# EAGLE board CORS_Time_Reference-Panel (EAGLE 9.6.2), part 1 of 2
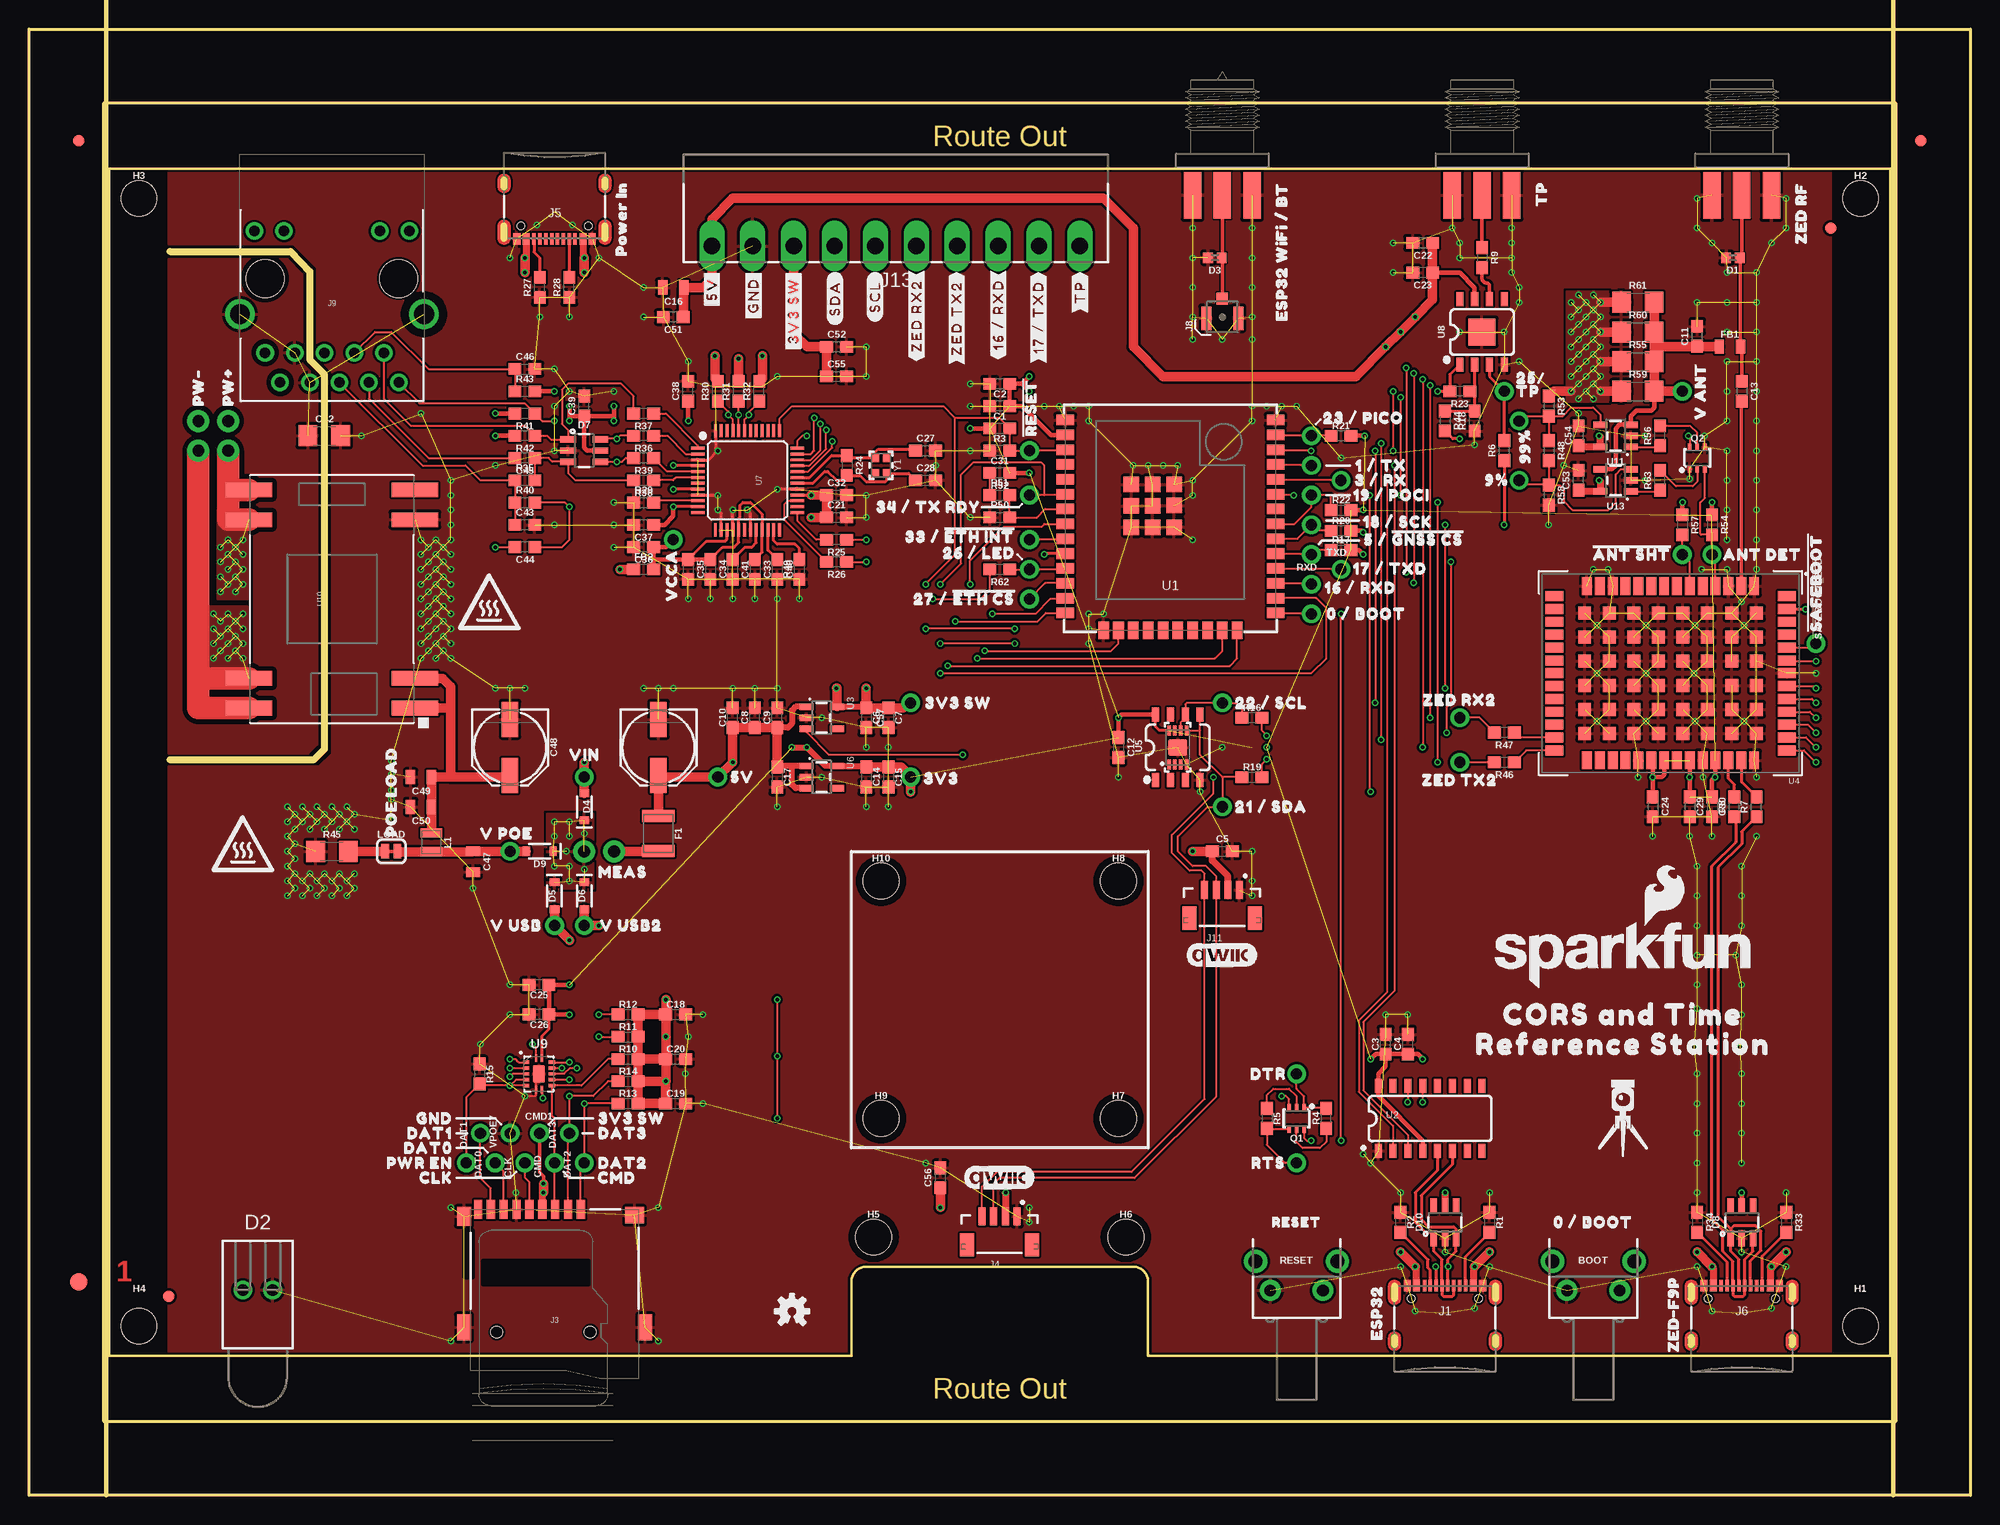
[diagram p0: board, top side]
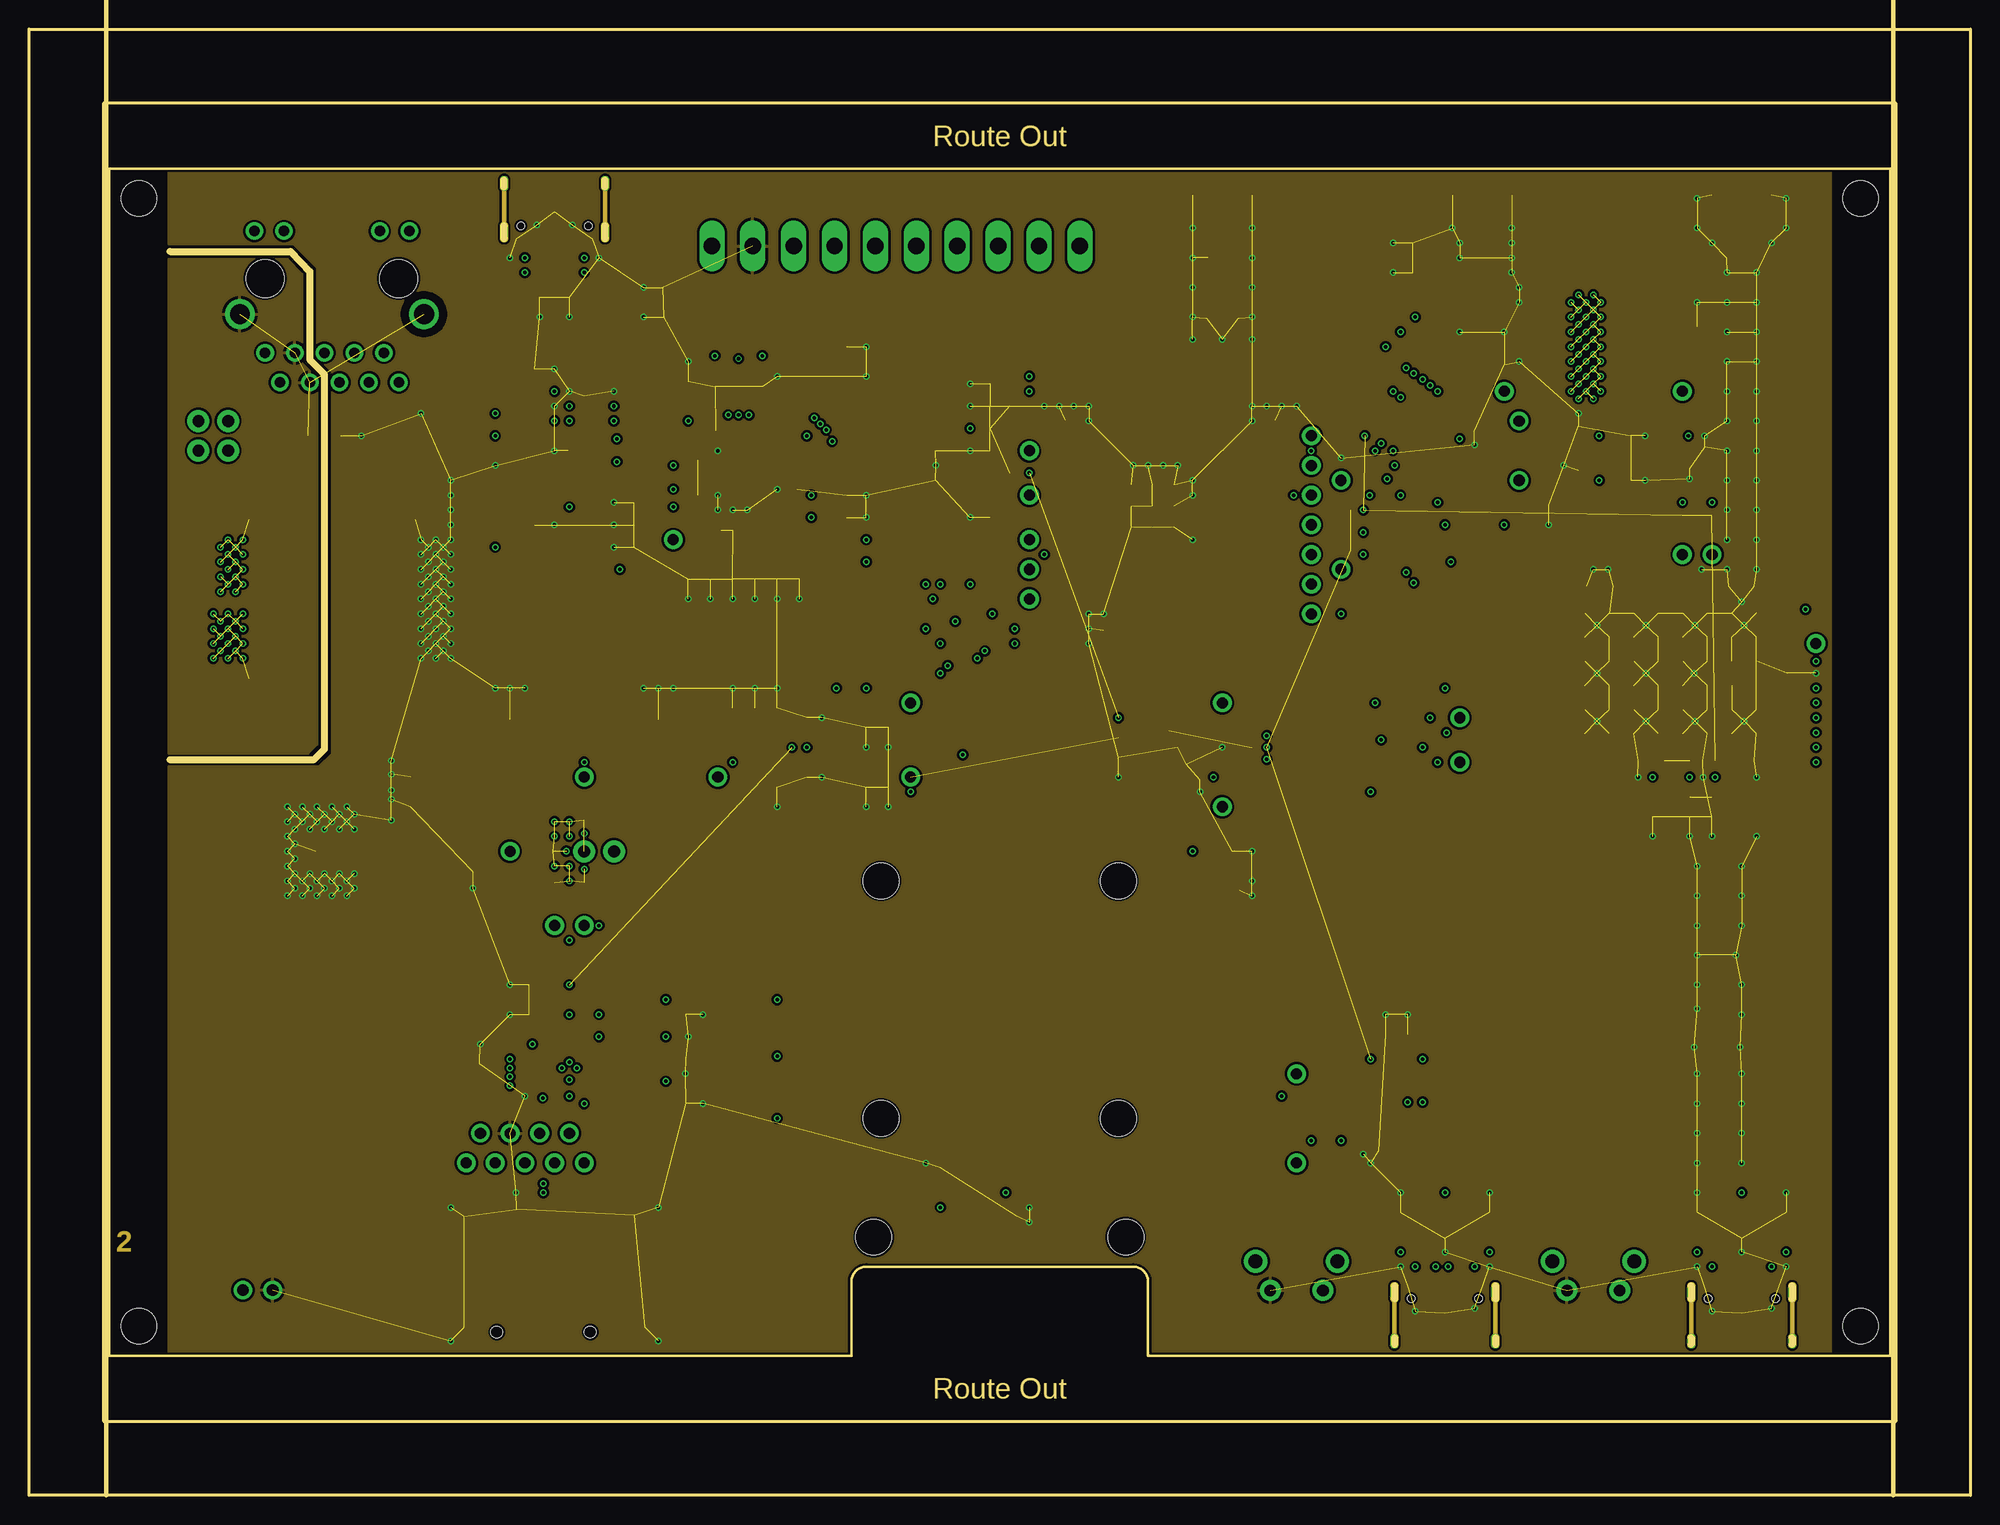
[diagram p1: board, inner layer Route2]
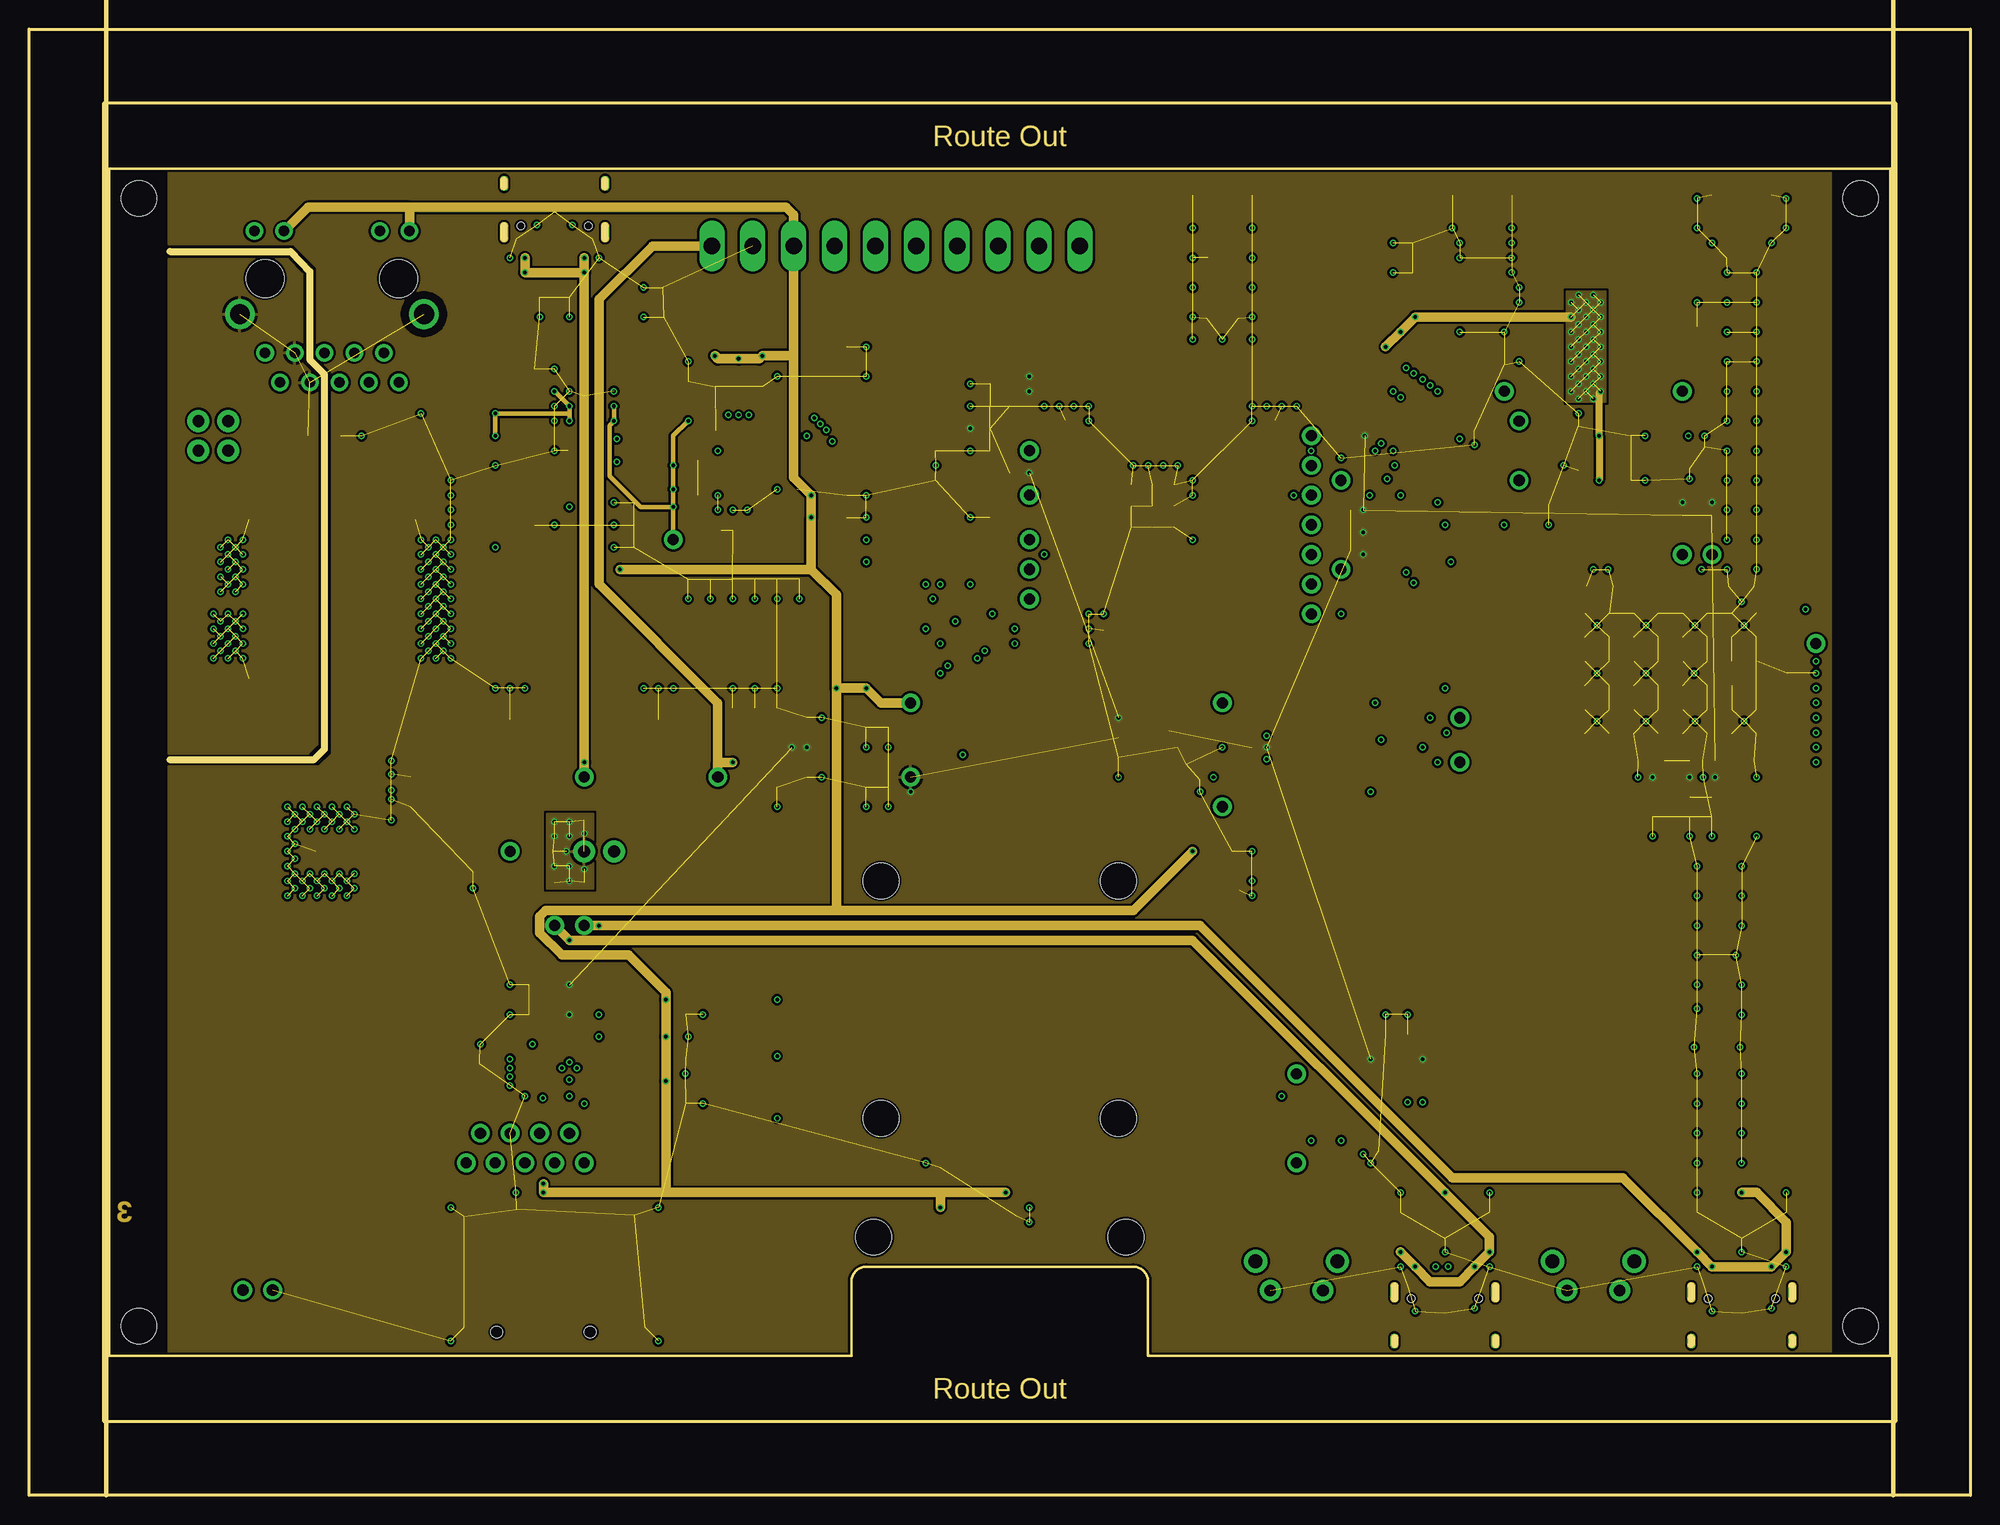
[diagram p2: board, inner layer Route15]
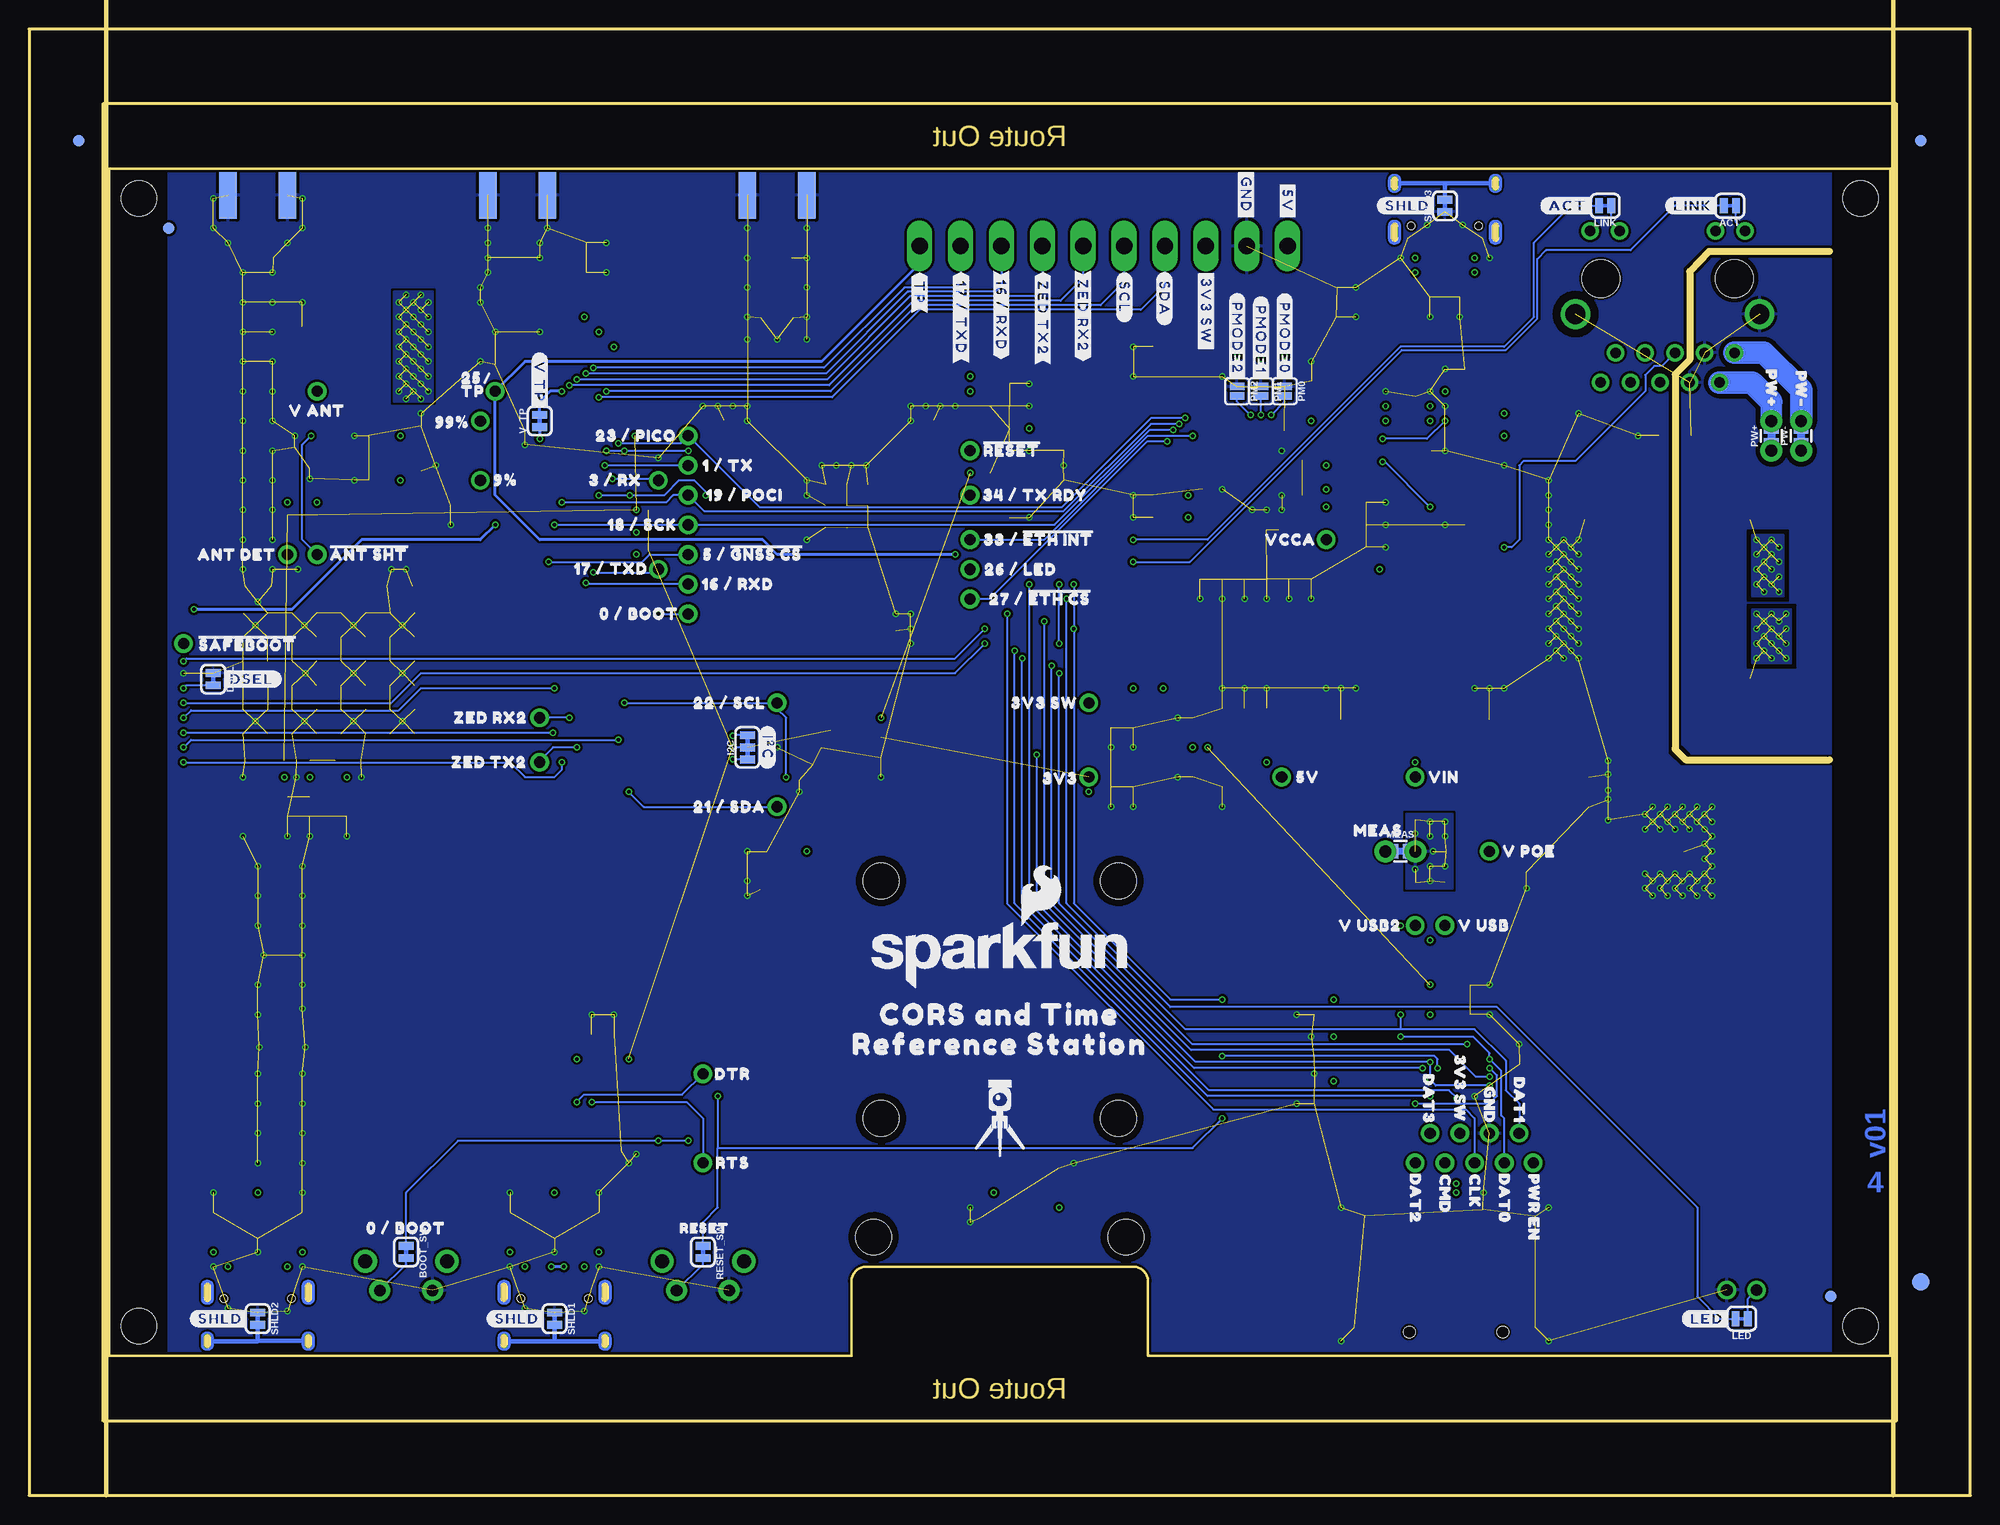
[diagram p3: board, bottom side, seen from below]

Size 166.12 x 125.48 mm. Coordinates in mm from the lower left corner, seen from the top.
Outline: 6.86,11.94 70.36,11.94 70.36,18.29 arc-90 71.63,19.56 94.49,19.56 arc-90 95.76,18.29 95.76,11.94 159.26,11.94 159.26,113.54 6.86,113.54 6.86,11.94
Outline: 6.35,6.35 159.77,6.35 159.77,119.13 6.35,119.13 6.35,6.35
Outline: 166.12,0 0,0 0,125.48 166.12,125.48 166.12,0
Copper layers (1*2*15*16): Top 0.035559375mm / dielectric 0.47751875mm / Route2 0.035559375mm / dielectric 0.47751875mm / Route15 0.035559375mm / dielectric 0.47751875mm / Bottom 0.035559375mm
Design rules "CORS_Time_Reference": minimum track width 5mil, minimum drill 0.2mm, track to track 5mil, track to pad 5mil, pad to pad 5mil, via to via 5mil, smd to smd 5mil, copper to edge 7mil, drill to drill 7mil, minimum pad ring 5mil, minimum via ring 5mil, stop-mask expansion 2.5mil, vias tented up to drill 25mil, thermal gap 10mil
tKeepout: area 6.9,18.3 to 11.9,107.2; area 154.2,18.3 to 159.3,107.2
Milling: 9 lines

## Footprints (pad centres in the part's own frame; a part is rotated, then mirrored left to right if it is on the bottom)
1X01_NO_SILK = drill 0.95 pad 1.6: 1 0,0
SMT-JUMPER_2_NC_TRACE_SILK = smd 0.66 x 1.27: 1 -0.521,0; 2 0.521,0
TACTILE_SWITCH_PTH_RA_8-020 = drill 1 pad 1.8: 1 -2.25,0; 2 2.25,0 | drill 1.2 pad 2: M1 -3.5,2.5; M2 3.5,2.5
0603 = smd 1.1 x 1: 1 -0.85,0; 2 0.85,0
0805 = smd 0.8 x 1.2: 1 -0.9,0; 2 0.9,0
0603_NO_CREAM = smd 1.1 x 1: 1 -0.85,0; 2 0.85,0
1206 = smd 1.6 x 1.8: 1 -1.4,0; 2 1.4,0
PANASONIC_D = smd 3 x 1.4: + 2.4,0; - -2.4,0
0402 = smd 0.85 x 0.9: 1 -0.58,0; 2 0.58,0
CBI-RIGHT-ANGLE-PTH = drill 1 pad 1.6: A -1.27,5; C 1.27,5
SOD-323 = smd 0.63 x 0.83: A 1.15,0; C -1.15,0
SOT-23-6 = smd 0.55 x 1.35: 1 -0.95,-1.375; 2 0,-1.375; 3 0.95,-1.375; 4 0.95,1.375; 5 0,1.375; 6 -0.95,1.375
FIDUCIAL-1X2 = smd 1 x 1: 1 0,0
FIDUCIAL-1.5X3 = smd 1.5 x 1.5: 1 0,0
1210 = smd 1 x 2.8: 1 -1.5,0; 2 1.5,0
STAND-OFF-TIGHT = hole 3.048: 0,0
SMT-JUMPER_3_2-NC_TRACE_SILK = smd 0.66 x 1.27: 1 -1.041,0; 2 0,0; 3 1.041,0
USB-C-16P_4LAYER-PADS = smd 0.3 x 1: A5 -1.25,-0.34; A6 -0.25,-0.34; A7 0.25,-0.34; A8 1.25,-0.34; B5 1.75,-0.34; B6 0.75,-0.34; B7 -0.75,-0.34; B8 -1.75,-0.34 | smd 0.6 x 1: GND -3.225,-0.34; GND2 3.225,-0.34; VBUS1 -2.45,-0.34; VBUS2 2.45,-0.34 | drill 0.4 pad 0.6 long: SHLD1 -4.318,-0.915; SHLD2 4.318,-0.915; SHLD3 -4.318,-5.095; SHLD4 4.318,-5.095 | hole 0.65: -2.89,-1.445; 2.89,-1.445
SMA-EDGE = smd 1.5 x 4: GND@0 -2.54,0; GND@1 2.54,0; SIG 0,0 | smd 1.5 x 4 bottom: GND@2 -2.54,0; GND@3 2.54,0
MICROSD-EXTERNALPIN = smd 0.7 x 1.6: 1 2.25,10.5; 2 1.15,10.5; 3 0.05,10.5; 4 -1.05,10.5; 5 -2.15,10.5; 6 -3.25,10.5; 7 -4.35,10.5; 8 -5.45,10.5; 9 -6.55,10.5 | smd 1.2 x 1.6: 10 -7.75,9.9 | smd 1.2 x 2.2: 11 -7.75,0.4; 12 7.75,0.4 | smd 1.6 x 1.4: 13 6.85,10 | hole 1: 3.05,0; -4.95,0
JST04_1MM_VERT = smd 0.6 x 1.55: 1 -1.478,0.775; 2 -0.478,0.775; 3 0.522,0.775; 4 1.522,0.775 | smd 1.2 x 2: NC1 -2.778,3.2; NC2 2.822,3.2
RP-SMA-EDGE = smd 1.5 x 4: GND@0 -2.54,0; GND@1 2.54,0; SIG 0,0 | smd 1.5 x 4 bottom: GND@2 -2.54,0; GND@3 2.54,0
U.FL_REDUCED_FOOTPRINT = smd 2 x 0.85: 1 -0.1,1.375; 2 -0.1,-1.375 | smd 1.05 x 1: FEED 1.575,0
MAGJACK-SYM_LED = drill 0.9 pad 1.5: 1 -5.715,8.89; 2 -4.445,6.35; 3 -3.175,8.89; 4 -1.905,6.35; 5 -0.635,8.89; 6 0.635,6.35; 7 1.905,8.89; 8 3.175,6.35; 9 4.445,8.89; 10 5.715,6.35; 11 -6.63,-4.06; 12 -4.09,-4.06; 13 4.09,-4.06; 14 6.63,-4.06 | drill 1.7 pad 2.4: S1 -7.875,3.05; S2 7.875,3.05 | hole 3.25: -5.715,0; 5.715,0
1X10_SCREW_TERMINAL_3.5MM = drill 1.4 pad 2.2 long: 1 -15.75,2.8; 2 -12.25,2.8; 3 -8.75,2.8; 4 -5.25,2.8; 5 -1.75,2.8; 6 1.75,2.8; 7 5.25,2.8; 8 8.75,2.8; 9 12.25,2.8; 10 15.75,2.8
0805-WIDE = smd 0.8 x 1.8: 1 -0.8,0; 2 0.8,0
COMBO-JUMPER_2_NC_TRACE = smd 0.635 x 1.27: 1 -0.508,0; 2 0.508,0 | drill 1.016 pad 1.88: 3 -1.27,0; 4 1.27,0
SMT-JUMPER_2_NO_SILK = smd 0.635 x 1.27: 1 -0.406,0; 2 0.406,0
SC70-6 = smd 0.3 x 0.66: 1 -0.65,-0.92; 2 0,-0.92; 3 0.65,-0.92; 4 0.65,0.92; 5 0,0.92; 6 -0.65,0.92
ESP-WROOM-32EU = smd 0.9 x 1.5: 1 6.43,9; 2 5.16,9; 3 3.89,9; 4 2.62,9; 5 1.35,9; 6 0.08,9; 7 -1.19,9; 8 -2.46,9; 9 -3.73,9; 10 -5,9; 11 -6.27,9; 12 -7.54,9; 13 -8.81,9; 14 -10.08,9; 25 -10.08,-9; 26 -8.81,-9; 27 -7.54,-9; 28 -6.27,-9; 29 -5,-9; 30 -3.73,-9; 31 -2.46,-9; 32 -1.19,-9; 33 0.08,-9; 34 1.35,-9; 35 2.62,-9; 36 3.89,-9; 37 5.16,-9; 38 6.43,-9 | smd 1.5 x 0.9: 15 -11.57,5.715; 16 -11.57,4.445; 17 -11.57,3.175; 18 -11.57,1.905; 19 -11.57,0.635; 20 -11.57,-0.635; 21 -11.57,-1.905; 22 -11.57,-3.175; 23 -11.57,-4.445; 24 -11.57,-5.715 | smd 1.33 x 1.33: GND -0.912,1.531; GNDT1 -2.751,3.346; GNDT2 -2.761,1.516; GNDT3 -2.751,-0.314; GNDT4 -0.891,-0.324; GNDT5 0.909,-0.314; GNDT6 0.909,1.516; GNDT7 0.909,3.346; GNDT8 -0.921,3.346
SO016 = smd 0.6 x 1.2: 1 -4.445,-2.8; 2 -3.175,-2.8; 3 -1.905,-2.8; 4 -0.635,-2.8; 5 0.635,-2.8; 6 1.905,-2.8; 7 3.175,-2.8; 8 4.445,-2.8; 9 4.445,2.8; 10 3.175,2.8; 11 1.905,2.8; 12 0.635,2.8; 13 -0.635,2.8; 14 -1.905,2.8; 15 -3.175,2.8; 16 -4.445,2.8
SOT23-5 = smd 0.55 x 1.2: 1 -0.95,-1.3; 2 0,-1.3; 3 0.95,-1.3; 4 0.95,1.3; 5 -0.95,1.3
ZED-F9P = smd 0.85 x 1.52: 1 -7.15,-7.45; 2 -6.05,-7.45; 3 -4.95,-7.45; 4 -3.85,-7.45; 5 -2.75,-7.45; 6 -1.65,-7.45; 7 -0.55,-7.45; 8 0.55,-7.45; 9 1.65,-7.45; 10 2.75,-7.45; 11 3.85,-7.45; 12 4.95,-7.45; 13 6.05,-7.45; 14 7.15,-7.45; 28 7.15,7.45; 29 6.05,7.45; 30 4.95,7.45; 31 3.85,7.45; 32 2.75,7.45; 33 1.65,7.45; 34 0.55,7.45; 35 -0.55,7.45; 36 -1.65,7.45; 37 -2.75,7.45; 38 -3.85,7.45; 39 -4.95,7.45; 40 -6.05,7.45; 41 -7.15,7.45 | smd 1.52 x 0.85: 15 9.95,-6.6; 16 9.95,-5.5; 17 9.95,-4.4; 18 9.95,-3.3; 19 9.95,-2.2; 20 9.95,-1.1; 21 9.95,0; 22 9.95,1.1; 23 9.95,2.2; 24 9.95,3.3; 25 9.95,4.4; 26 9.95,5.5; 27 9.95,6.6; 42 -9.95,6.6; 43 -9.95,5.5; 44 -9.95,4.4; 45 -9.95,3.3; 46 -9.95,2.2; 47 -9.95,1.1; 48 -9.95,0; 49 -9.95,-1.1; 50 -9.95,-2.2; 51 -9.95,-3.3; 52 -9.95,-4.4; 53 -9.95,-5.5; 54 -9.95,-6.6 | smd 1.1 x 1.1: 55 -1.05,-1.05; 56 -3.15,-1.05; 57 -5.25,-1.05; 58 -7.35,-1.05; 59 -1.05,-3.1; 60 -3.15,-3.1; 61 -5.25,-3.1; 62 -7.35,-3.1; 63 -1.05,-5.15; 64 -3.15,-5.15; 65 -5.25,-5.15; 66 -7.35,-5.15; 67 -1.05,5.15; 68 -3.15,5.15; 69 -5.25,5.15; 70 -7.35,5.15; 71 -1.05,3.1; 72 -3.15,3.1; 73 -5.25,3.1; 74 -7.35,3.1; 75 -1.05,1.05; 76 -3.15,1.05; 77 -5.25,1.05; 78 -7.35,1.05; 79 1.05,1.05; 80 3.15,1.05; 81 5.25,1.05; 82 7.35,1.05; 83 1.05,3.1; 84 3.15,3.1; 85 5.25,3.1; 86 7.35,3.1; 87 1.05,5.15; 88 3.15,5.15; 89 5.25,5.15; 90 7.35,5.15; 91 1.05,-5.15; 92 3.15,-5.15; 93 5.25,-5.15; 94 7.35,-5.15; 95 1.05,-3.1; 96 3.15,-3.1; 97 5.25,-3.1; 98 7.35,-3.1; 99 1.05,-1.05; 100 3.15,-1.05; 101 5.25,-1.05; 102 7.35,-1.05
DUAL_UDFN_2X3MM_SOIC-8 = smd 0.3 x 0.85: 1 -0.75,-1.45; 2 -0.25,-1.45; 3 0.25,-1.45; 4 0.75,-1.45; 5 0.75,1.45; 6 0.25,1.45; 7 -0.25,1.45; 8 -0.75,1.45 | smd 0.6 x 1.2: 1S -1.905,-2.8; 2S -0.635,-2.8; 3S 0.635,-2.8; 4S 1.905,-2.8; 5S 1.905,2.8; 6S 0.635,2.8; 7S -0.635,2.8; 8S -1.905,2.8 | smd 1.6 x 1.4: P 0,0
LQFP-48 = smd 0.254 x 1.143: 1 -2.75,-4.25; 2 -2.25,-4.25; 3 -1.75,-4.25; 4 -1.25,-4.25; 5 -0.75,-4.25; 6 -0.25,-4.25; 7 0.25,-4.25; 8 0.75,-4.25; 9 1.25,-4.25; 10 1.75,-4.25; 11 2.25,-4.25; 12 2.75,-4.25; 25 2.75,4.25; 26 2.25,4.25; 27 1.75,4.25; 28 1.25,4.25; 29 0.75,4.25; 30 0.25,4.25; 31 -0.25,4.25; 32 -0.75,4.25; 33 -1.25,4.25; 34 -1.75,4.25; 35 -2.25,4.25; 36 -2.75,4.25 | smd 1.143 x 0.254: 13 4.25,-2.75; 14 4.25,-2.25; 15 4.25,-1.75; 16 4.25,-1.25; 17 4.25,-0.75; 18 4.25,-0.25; 19 4.25,0.25; 20 4.25,0.75; 21 4.25,1.25; 22 4.25,1.75; 23 4.25,2.25; 24 4.25,2.75; 37 -4.25,2.75; 38 -4.25,2.25; 39 -4.25,1.75; 40 -4.25,1.25; 41 -4.25,0.75; 42 -4.25,0.25; 43 -4.25,-0.25; 44 -4.25,-0.75; 45 -4.25,-1.25; 46 -4.25,-1.75; 47 -4.25,-2.25; 48 -4.25,-2.75
SO08_PAD = smd 0.6 x 1.2: 1 -1.905,-2.8; 2 -0.635,-2.8; 3 0.635,-2.8; 4 1.905,-2.8; 5 1.905,2.8; 6 0.635,2.8; 7 -0.635,2.8; 8 -1.905,2.8 | smd 2.311 x 2.311: PAD 0,0
14-QFN = smd 0.25 x 0.6: 1 -0.25,1.35; 7 -0.25,-1.35; 8 0.25,-1.35; 14 0.25,1.35 | smd 0.6 x 0.25: 2 -1.1,1; 3 -1.1,0.5; 4 -1.1,0; 5 -1.1,-0.5; 6 -1.1,-1; 9 1.1,-1; 10 1.1,-0.5; 11 1.1,0; 12 1.1,0.5; 13 1.1,1 | smd 1 x 1.5: EPAD 0,0
DP990X = smd 1.25 x 4: 1 -9.33,-7.1; 2 -6.79,-7.1; 3 6.79,-7.1; 4 9.33,-7.1; 5 9.33,7.1; 6 6.79,7.1; 7 -6.79,7.1; 8 -9.33,7.1
CRYSTAL-SMD-2.0X1.6MM = smd 0.75 x 0.7: 1 -0.675,-0.5; 2 0.675,-0.5; 3 0.675,0.5; 4 -0.675,0.5

## Placement (x,y rotation side)
3V3  TEST-POINTPOGO_PTH  [1X01_NO_SILK]  75.44,61.47 0 top
3V3_SW  TEST-POINTPOGO_PTH  [1X01_NO_SILK]  75.44,67.82 0 top
5V  TEST-POINTPOGO_PTH  [1X01_NO_SILK]  58.93,61.47 0 top
9%  TEST-POINTPOGO_PTH  [1X01_NO_SILK]  127.51,86.87 0 top
99%  TEST-POINTPOGO_PTH  [1X01_NO_SILK]  127.51,91.95 0 top
!SAFEBOOT_ZED!  TEST-POINTPOGO_PTH  [1X01_NO_SILK]  152.91,72.9 0 top
ACT  JUMPER-SMT_2_NC_TRACE_SILK  [SMT-JUMPER_2_NC_TRACE_SILK]  20.57,110.36 180 bottom
ANT_DET  TEST-POINTPOGO_PTH  [1X01_NO_SILK]  144.02,80.52 0 top
ANT_SHT  TEST-POINTPOGO_PTH  [1X01_NO_SILK]  141.48,80.52 0 top
BOOT  MOMENTARY-SWITCH-SPST-PTH-RIGHT-ANGLE-8-020  [TACTILE_SWITCH_PTH_RA_8-020]  133.86,17.53 0 top
BOOT_SW  JUMPER-SMT_2_NC_TRACE_SILK  [SMT-JUMPER_2_NC_TRACE_SILK]  133.86,20.83 270 bottom
C1  2.2uF  [0603]  83.06,93.22 180 top
C2  0.1uF  [0603]  83.06,95.12 180 top
C3  2.2uF  [0603]  116.08,38.61 90 top
C4  10nF  [0603]  117.98,38.61 90 top
C5  2.2uF  [0603]  102.11,55.12 0 top
C6  2.2uF  [0603]  71.63,66.55 270 top
C7  0.1uF  [0603]  73.53,66.55 270 top
C8  2.2uF  [0603]  62.1,66.55 90 top
C9  2.2uF  [0603]  64.01,66.55 90 top
C10  2.2uF  [0603]  60.2,66.55 90 top
C11  47pF  [0603]  142.75,99.19 90 top
C12  0.1uF  [0603]  93.22,64.01 270 top
C13  47pF  [0603]  146.56,94.49 270 top
C14  2.2uF  [0603]  71.63,61.47 270 top
C15  0.1uF  [0603]  73.53,61.47 270 top
C16  10uF  [0805]  55.12,103.38 180 top
C17  0.1uF  [0603]  64.01,61.47 270 top
C18  2.2uF  [0603]  55.31,41.15 0 top
C19  0.1uF  [0603]  55.31,33.53 0 top
C20  10uF  [0603]  55.31,37.34 0 top
C21  0.1uF  [0603]  69.09,83.69 0 top
C22  10uF  [0603]  119.25,107.19 180 top
C23  0.1uF  [0603]  119.25,104.65 180 top
C24  1.0uF  [0603]  138.94,58.93 270 top
C25  2.2uF  [0603]  43.62,43.69 180 top
C26  2.2uF  [0603]  43.62,41.15 180 top
C27  10pF  [0603]  76.71,89.41 0 top
C28  10pF  [0603]  76.71,86.87 0 top
C29  2.2uF  [0603]  142.11,58.93 270 top
C30  0.1uF  [0603]  144.02,58.93 270 top
C31  DNP  [0603_NO_CREAM]  83.06,89.41 180 top
C32  10uF  [0603]  69.09,85.6 0 top
C33  0.1uF  [0603]  62.1,79.25 270 top
C34  0.1uF  [0603]  58.29,79.25 270 top
C35  0.1uF  [0603]  56.39,79.25 270 top
C36  0.1uF  [0603]  52.58,81.15 180 top
C37  0.1uF  [0603]  52.58,83.06 180 top
C38  0.1uF  [0603]  56.39,94.49 90 top
C39  10uF  [0603]  47.5,93.22 90 top
C40  10nF  [0603]  64.01,79.25 270 top
C41  4.7uF  [0603]  60.2,79.25 270 top
C42  1nF  [1206]  25.26,90.68 0 top
C43  10nF  [0603]  42.42,83.06 0 top
C44  6.8nF  [0603]  42.42,81.15 180 top
C45  6.8nF  [0603]  42.42,88.77 180 top
C46  22nF  [0603]  42.42,96.39 0 top
C47  10uF  [0805]  37.97,54.23 270 top
C48  100uF  [PANASONIC_D]  41.15,64.01 270 top
C49  10uF  [0805]  33.53,61.47 180 top
C50  10uF  [0805]  33.53,58.93 180 top
C51  0.1uF  [0603]  55.12,100.84 180 top
C52  0.1uF  [0603]  69.09,98.3 0 top
C53  0.1uF  [0603]  132.59,86.87 90 top
C54  0.1uF  [0603]  132.59,90.68 90 top
C55  10uF  [0603]  69.09,95.76 0 top
C56  2.2uF  [0603]  77.98,27.18 90 top
C57  100uF  [PANASONIC_D]  53.85,64.01 270 top
CLK  TEST-POINTPOGO_PTH  [1X01_NO_SILK]  42.42,28.45 90 top
CMD  TEST-POINTPOGO_PTH  [1X01_NO_SILK]  44.96,28.45 90 top
CMD1  TEST-POINTPOGO_PTH  [1X01_NO_SILK]  43.69,30.99 0 top
D1  PESD0402-0402  [0402]  145.8,105.92 180 top
D2  LED-RIGHT-ANGLE-PTH-BLUE  [CBI-RIGHT-ANGLE-PTH]  19.56,12.57 0 top
D3  PESD0402-0402  [0402]  101.47,105.92 180 top
D4  3A/10V/280mV  [SOD-323]  47.5,58.93 90 top
D5  3A/10V/280mV  [SOD-323]  44.96,51.31 270 top
D6  3A/10V/280mV  [SOD-323]  47.5,51.31 270 top
D7  ESD Diode  [SOT-23-6]  47.5,89.41 270 top
D8  ESD Diode  [SOT-23-6]  146.56,23.37 0 top
D9  3A/10V/280mV  [SOD-323]  43.69,55.12 180 top
D10  ESD Diode  [SOT-23-6]  121.16,23.37 0 top
DAT0  TEST-POINTPOGO_PTH  [1X01_NO_SILK]  39.88,28.45 90 top
DAT1  TEST-POINTPOGO_PTH  [1X01_NO_SILK]  38.61,30.99 90 top
DAT2  TEST-POINTPOGO_PTH  [1X01_NO_SILK]  47.5,28.45 90 top
DAT3  TEST-POINTPOGO_PTH  [1X01_NO_SILK]  46.23,30.99 90 top
DSEL  JUMPER-SMT_2_NC_TRACE_SILK  [SMT-JUMPER_2_NC_TRACE_SILK]  150.37,69.85 270 bottom
DTR  TEST-POINTPOGO_PTH  [1X01_NO_SILK]  108.46,36.07 0 top
E$1  [FIDUCIAL-1X2]  4.23,115.95 0 top
E$2  [FIDUCIAL-1X2]  4.23,115.95 0 bottom
E$3  [FIDUCIAL-1X2]  161.88,115.95 0 top
E$4  [FIDUCIAL-1X2]  161.88,115.95 0 bottom
E$5  [FIDUCIAL-1.5X3]  4.23,18.29 0 top
E$6  [FIDUCIAL-1.5X3]  4.23,18.29 0 bottom
ETH_CS  TEST-POINTPOGO_PTH  [1X01_NO_SILK]  85.6,76.71 0 top
ETH_INT  TEST-POINTPOGO_PTH  [1X01_NO_SILK]  85.6,81.79 0 top
F1  6V/2A  [1210]  53.85,56.64 270 top
FB1  600Ω  [0805]  145.54,98.3 0 top
FB2  470Ω  [0603]  52.58,79.25 0 top
FD1  FIDUCIAL1X2  [FIDUCIAL-1X2]  11.94,17.02 0 bottom
FD2  FIDUCIAL1X2  [FIDUCIAL-1X2]  11.94,17.02 0 top
FD3  FIDUCIAL1X2  [FIDUCIAL-1X2]  154.18,108.46 0 bottom
FD4  FIDUCIAL1X2  [FIDUCIAL-1X2]  154.18,108.46 0 top
GNSS_CS  TEST-POINTPOGO_PTH  [1X01_NO_SILK]  109.73,80.52 0 top
H1  STAND-OFFTIGHT  [STAND-OFF-TIGHT]  156.72,14.48 0 top
H2  STAND-OFFTIGHT  [STAND-OFF-TIGHT]  156.72,111 0 top
H3  STAND-OFFTIGHT  [STAND-OFF-TIGHT]  9.4,111 0 top
H4  STAND-OFFTIGHT  [STAND-OFF-TIGHT]  9.4,14.48 0 top
H5  STAND-OFFTIGHT  [STAND-OFF-TIGHT]  72.26,22.1 0 top
H6  STAND-OFFTIGHT  [STAND-OFF-TIGHT]  93.85,22.1 0 top
H7  STAND-OFFTIGHT  [STAND-OFF-TIGHT]  93.22,32.26 0 top
H8  STAND-OFFTIGHT  [STAND-OFF-TIGHT]  93.22,52.58 0 top
H9  STAND-OFFTIGHT  [STAND-OFF-TIGHT]  72.9,32.26 0 top
H10  STAND-OFFTIGHT  [STAND-OFF-TIGHT]  72.9,52.58 0 top
I2C  JUMPER-SMT_3_2-NC_TRACE_SILK  [SMT-JUMPER_3_2-NC_TRACE_SILK]  104.65,64.01 90 bottom
J1  [USB-C-16P_4LAYER-PADS]  121.16,18.29 0 top
J2  ANTENNA-SMA-GROUNDEDEDGE_SMA  [SMA-EDGE]  146.56,111.25 0 top
J3  MICRO-SD-PUSH-PUSH-EXT-PIN  [MICROSD-EXTERNALPIN]  44.96,13.97 0 top
J4  Vertical Qwiic Connector  [JST04_1MM_VERT]  83.06,24.64 180 top
J5  [USB-C-16P_4LAYER-PADS]  44.96,107.19 180 top
J6  [USB-C-16P_4LAYER-PADS]  146.56,18.29 0 top
J7  ANTENNA-SMA-GROUNDEDEDGE_RPSMA  [RP-SMA-EDGE]  102.11,111.25 0 top
J8  [U.FL_REDUCED_FOOTPRINT]  102.11,100.84 90 top
J9  MAGJACK-POE  [MAGJACK-SYM_LED]  25.91,104.14 180 top
J10  ANTENNA-SMA-GROUNDEDEDGE_SMA  [SMA-EDGE]  124.33,111.25 0 top
J11  Vertical Qwiic Connector  [JST04_1MM_VERT]  102.11,52.58 180 top
J13  [1X10_SCREW_TERMINAL_3.5MM]  74.17,109.73 180 top
L1  2.2uH  [0805-WIDE]  34.42,55.88 270 top
LED  JUMPER-SMT_2_NC_TRACE_SILK  [SMT-JUMPER_2_NC_TRACE_SILK]  19.56,15.11 180 bottom
LINK  JUMPER-SMT_2_NC_TRACE_SILK  [SMT-JUMPER_2_NC_TRACE_SILK]  31.24,110.36 180 bottom
LOAD  JUMPER-SMT_2_NC_TRACE_SILK  [SMT-JUMPER_2_NC_TRACE_SILK]  30.99,55.12 0 top
LOGO2  QWIIC_LOGO_6MM  [QWIIC_6MM]  83.06,27.18 0 top
LOGO3  QWIIC_LOGO_6MM  [QWIIC_6MM]  102.11,46.23 0 top
LOGO4  OSHW-LOGOS  [OSHW-LOGO-S]  65.28,15.75 0 top
LOGO5  SFE_LOGO_NAME.2_INCH  [SFE_LOGO_NAME_.2]  136.4,46.23 0 top
LOGO6  SFE_LOGO_FLAME.2_INCH  [SFE_LOGO_FLAME_.2]  139.95,51.31 0 top
LOGO7  SFE_LOGO_NAME.2_INCH  [SFE_LOGO_NAME_.2]  83.06,46.23 0 bottom
LOGO8  SFE_LOGO_FLAME.2_INCH  [SFE_LOGO_FLAME_.2]  79.5,51.31 0 bottom
MEAS  JUMPER-COMBO_2_NC_TRACE  [COMBO-JUMPER_2_NC_TRACE]  48.77,55.12 0 bottom
PICO  TEST-POINTPOGO_PTH  [1X01_NO_SILK]  109.73,90.68 0 top
PM0  JUMPER-SMT_2_NO_SILK  [SMT-JUMPER_2_NO_SILK]  58.67,94.49 270 bottom
PM1  JUMPER-SMT_2_NO_SILK  [SMT-JUMPER_2_NO_SILK]  60.71,94.49 270 bottom
PM2  JUMPER-SMT_2_NO_SILK  [SMT-JUMPER_2_NO_SILK]  62.74,94.49 270 bottom
POCI  TEST-POINTPOGO_PTH  [1X01_NO_SILK]  109.73,85.6 0 top
PW+  JUMPER-COMBO_2_NC_TRACE  [COMBO-JUMPER_2_NC_TRACE]  17.02,90.68 90 bottom
PW-  JUMPER-COMBO_2_NC_TRACE  [COMBO-JUMPER_2_NC_TRACE]  14.48,90.68 90 bottom
PWREN  TEST-POINTPOGO_PTH  [1X01_NO_SILK]  37.4,28.45 0 top
Q1  [SC70-6]  108.46,32.26 180 top
Q2  [SC70-6]  142.75,88.77 0 top
R1  5.1k  [0603]  124.97,23.37 270 top
R2  5.1k  [0603]  117.35,23.37 270 top
R3  10k  [0603]  83.06,91.31 180 top
R4  10k  [0603]  111,32.26 90 top
R5  10k  [0603]  105.92,32.26 270 top
R6  33  [0603]  126.24,89.41 90 top
R7  27  [0603]  147.83,58.93 90 top
R8  27  [0603]  145.92,58.93 90 top
R9  49.9  [0603]  124.33,105.92 270 top
R10  10k  [0603]  51.24,37.34 0 top
R11  10k  [0603]  51.24,39.24 0 top
R12  10k  [0603]  51.24,41.15 0 top
R13  10k  [0603]  51.24,33.53 0 top
R14  10k  [0603]  51.24,35.43 0 top
R15  100k  [0603]  38.54,36.07 270 top
R16  2.2k  [0603]  104.65,66.55 0 top
R17  100k  [0603]  112.27,80.9 0 top
R18  100k  [0603]  123.7,91.95 90 top
R19  2.2k  [0603]  104.65,61.47 0 top
R20  100k  [0603]  112.27,82.55 0 top
R21  100k  [0603]  112.27,90.68 0 top
R22  10k  [0603]  112.27,84.33 0 top
R23  100k  [0603]  122.43,94.49 180 top
R24  1M  [0603]  69.98,88.14 270 top
R25  1k  [0603]  69.09,81.79 180 top
R26  1k  [0603]  69.09,79.88 180 top
R27  5.1k  [0603]  43.69,103.38 90 top
R28  5.1k  [0603]  46.23,103.38 90 top
R29  12.4k  [0603]  52.58,84.96 0 top
R30  10k  [0603]  58.93,94.49 90 top
R31  10k  [0603]  60.71,94.49 90 top
R32  10k  [0603]  62.48,94.49 90 top
R33  5.1k  [0603]  150.37,23.37 270 top
R34  5.1k  [0603]  142.75,23.37 270 top
R35  49.9  [0603]  42.42,86.87 0 top
R36  33  [0603]  52.58,90.68 180 top
R37  33  [0603]  52.58,92.58 180 top
R38  33  [0603]  52.58,86.87 180 top
R39  33  [0603]  52.58,88.77 180 top
R40  49.9  [0603]  42.42,84.96 0 top
R41  49.9  [0603]  42.42,92.58 180 top
R42  49.9  [0603]  42.42,90.68 180 top
R43  10  [0603]  42.42,94.49 0 top
R44  1k  [0603]  121.16,91.95 270 top
R45  49.9 1/2W  [1206]  25.91,55.12 0 top
R46  33  [0603]  126.24,62.74 180 top
R47  33  [0603]  126.24,65.28 180 top
R48  100k  [0603]  130.05,89.41 270 top
R49  10k  [0603]  65.91,79.25 90 top
R50  10k  [0603]  83.06,83.69 0 top
R51  10k  [0603]  83.06,85.6 0 top
R52  10k  [0603]  83.06,87.5 180 top
R53  1k  [0603]  130.05,93.22 270 top
R54  10k  [0603]  144.02,83.06 270 top
R55  49.9 1/2W  [1206]  137.67,97.03 0 top
R56  1k  [0603]  139.57,90.68 90 top
R57  10k  [0603]  141.48,83.06 270 top
R58  10k  [0603]  130.05,85.6 270 top
R59  49.9 1/2W  [1206]  137.67,94.49 0 top
R60  49.9 1/2W  [1206]  137.67,99.57 0 top
R61  49.9 1/2W  [1206]  137.67,102.11 0 top
R62  470  [0603]  83.06,79.25 180 top
R63  1k  [0603]  139.57,86.87 90 top
RESET  MOMENTARY-SWITCH-SPST-PTH-RIGHT-ANGLE-8-020  [TACTILE_SWITCH_PTH_RA_8-020]  108.46,17.53 0 top
RESET_SW  JUMPER-SMT_2_NC_TRACE_SILK  [SMT-JUMPER_2_NC_TRACE_SILK]  108.46,20.83 270 bottom
RTS  TEST-POINTPOGO_PTH  [1X01_NO_SILK]  108.46,28.45 0 top
RX  TEST-POINTPOGO_PTH  [1X01_NO_SILK]  112.27,86.87 0 top
RX2  TEST-POINTPOGO_PTH  [1X01_NO_SILK]  122.43,66.55 0 top
RXD  TEST-POINTPOGO_PTH  [1X01_NO_SILK]  109.73,77.98 0 top
SCK  TEST-POINTPOGO_PTH  [1X01_NO_SILK]  109.73,83.06 0 top
SCL  TEST-POINTPOGO_PTH  [1X01_NO_SILK]  102.11,67.82 0 top
SDA  TEST-POINTPOGO_PTH  [1X01_NO_SILK]  102.11,58.93 0 top
SHLD1  JUMPER-SMT_2_NC_TRACE_SILK  [SMT-JUMPER_2_NC_TRACE_SILK]  121.16,15.11 270 bottom
SHLD2  JUMPER-SMT_2_NC_TRACE_SILK  [SMT-JUMPER_2_NC_TRACE_SILK]  146.56,15.11 270 bottom
SHLD3  JUMPER-SMT_2_NC_TRACE_SILK  [SMT-JUMPER_2_NC_TRACE_SILK]  44.96,110.36 90 bottom
TP  TEST-POINTPOGO_PTH  [1X01_NO_SILK]  126.24,94.49 0 top
TP_BOOT  TEST-POINTPOGO_PTH  [1X01_NO_SILK]  109.73,75.44 0 top
TP_LED  TEST-POINTPOGO_PTH  [1X01_NO_SILK]  85.6,79.25 0 top
TP_RESET  TEST-POINTPOGO_PTH  [1X01_NO_SILK]  85.6,89.41 0 top
TX  TEST-POINTPOGO_PTH  [1X01_NO_SILK]  109.73,88.14 0 top
TX2  TEST-POINTPOGO_PTH  [1X01_NO_SILK]  122.43,62.74 0 top
TX_RDY  TEST-POINTPOGO_PTH  [1X01_NO_SILK]  85.6,85.6 0 top
TXD  TEST-POINTPOGO_PTH  [1X01_NO_SILK]  112.27,79.25 0 top
U1  ESP-WROOM-32E  [ESP-WROOM-32EU]  97.66,85.6 90 top
U2  CH340C  [SO016]  119.89,32.26 0 top
U3  XC6222B331MR-G  [SOT23-5]  67.82,66.55 270 top
U4  U-BLOX_ZED-F9P  [ZED-F9P]  140.46,70.36 180 top
U5  ATECC608A  [DUAL_UDFN_2X3MM_SOIC-8]  98.3,64.01 0 top
U6  XC6222B331MR-G  [SOT23-5]  67.82,61.47 270 top
U7  W5500  [LQFP-48]  61.47,86.87 270 top
U8  ADC8045  [SO08_PAD]  124.33,99.57 0 top
U9  74HC4066_QUAD_BILATERAL_SWITCH_QFN  [14-QFN]  43.62,36.07 0 top
U10  POE_PSU-DP990X  [DP990X]  25.91,76.71 90 top
U11  OPA344  [SOT23-5]  135.76,90.68 90 top
U13  OPA344  [SOT23-5]  135.76,86.87 90 top
U$2  [RESET0]  108.46,23.37 0 top
U$3  [#SHLD#0]  147.19,15.11 0 bottom
U$4  [#SHLD#0]  45.59,110.36 0 bottom
U$5  [PW#0]  14.48,92.58 90 top
U$6  [PW#1]  17.02,92.58 90 top
U$7  [0_#_BOOT0]  133.86,23.37 0 top
U$8  [POWER_IN0]  50.67,109.22 90 top
U$9  [#ACT#0]  32.13,110.36 0 bottom
U$10  [#LINK#1]  21.46,110.36 0 bottom
U$11  [#3V3_SW#0]  65.41,104.9 90 top
U$12  [#5V#0]  58.42,104.9 90 top
U$13  [#GND#6]  61.98,104.9 90 top
U$14  [#ZED_RX2#0]  75.95,104.78 90 top
U$15  [#SCL#8]  72.39,104.65 90 top
U$16  [#SDA#7]  68.96,104.65 90 top
U$17  [#ZED_RX2#3]  75.95,104.78 270 bottom
U$18  [#ZED_TX2#0]  79.38,104.65 90 top
U$19  [#ZED_TX2#3]  79.38,104.65 270 bottom
U$20  [#16_#_RXD#0]  82.93,104.78 90 top
U$21  [ESP32_WIFI_#_BT0]  107.19,113.03 90 top
U$22  [TP0]  129.41,111.38 90 top
U$23  [ZED_RF0]  151.64,109.73 90 top
U$24  [VCCA0]  54.99,78.74 90 top
U$25  [#RESET#0]  85.6,93.09 90 top
U$26  [34_#_TX_RDY0]  76.96,84.58 0 top
U$27  [33_#_#ETH_INT#0]  79.63,82.17 0 top
U$28  [26_#_LED0]  81.28,80.64 0 top
U$29  [27_#_#ETH_CS#0]  80.01,76.84 0 top
U$30  [23_#_PICO23]  114.17,92.2 0 top
U$31  [22_#_SCL20]  106.3,67.82 0 top
U$32  [18_#_SCK6]  117.09,83.31 0 top
U$33  [19_#_POCI19]  116.59,85.6 0 top
U$34  [1_#_TX20]  115.7,88.14 0 top
U$35  [3_#_RX20]  115.7,86.87 0 top
U$36  [5_#_#GNSS_CS#1]  118.49,81.92 0 top
U$37  [0_#_BOOT0]  114.43,75.44 0 top
U$38  [21_#_SDA24]  106.3,58.93 0 top
U$39  [ZED_RX224]  122.43,68.07 0 top
U$40  [ZED_TX2225]  122.43,61.21 0 top
U$41  [#SAFEBOOT#2226]  152.78,78.11 90 top
U$42  [ANT_DET2227]  148.34,80.52 0 top
U$43  [#ANT_SHT#2228]  137.16,80.64 0 top
U$44  [9#2230]  125.6,86.87 0 top
U$45  [#SHLD#0]  121.79,15.11 0 bottom
U$46  [#I�C#0]  102.93,64.01 270 bottom
U$47  [99#2230]  128.02,89.79 90 top
U$48  [TP2230]  128.27,94.49 0 top
U$49  [V_ANT2229]  143,94.49 90 top
U$55  [RTS2231]  106.05,28.45 0 top
U$56  [DTR2232]  106.05,36.07 0 top
U$57  [3V3_SW15]  43.69,34.8 270 bottom
U$58  [#LED#2234]  20.45,15.11 0 bottom
U$59  [3V3_SW25]  83.06,67.82 0 top
U$60  [3V325]  80.26,61.34 0 top
U$61  [5V25]  62.74,61.47 0 top
U$62  [MEAS2]  53.59,53.34 0 top
U$63  [VIN1]  49.53,63.37 0 top
U$64  [V_USB3]  44.58,48.77 0 top
U$65  [V_USB24]  54.86,48.77 0 top
U$66  [V_POE0]  43.81,56.64 0 top
U$67  [#PMODE0#0]  58.67,95.25 270 bottom
U$68  [#PMODE1#1]  60.71,95.25 270 bottom
U$69  [#PMODE2#2]  62.74,95.25 270 bottom
U$70  [CORS_AND_TIME0]  136.4,41.15 0 top
U$71  [#V_TP#3]  122.43,92.84 270 bottom
U$72  [#DSEL#0]  144.53,69.85 0 bottom
U$73  [REFERENCE_STATION1]  136.4,38.61 0 top
U$74  [CORS_AND_TIME0]  83.06,41.15 0 bottom
U$75  [REFERENCE_STATION1]  83.06,38.61 0 bottom
U$76  [RTS2231]  105.92,28.45 0 bottom
U$77  [DTR2232]  105.92,36.07 0 bottom
U$78  [ESP320]  115.32,15.62 90 top
U$79  [ZED#F9P321]  140.72,15.49 90 top
U$80  [PWR_EN2233]  37.34,24.64 270 bottom
U$81  [V_POE0]  34.8,55.12 0 bottom
U$82  [V_USB3]  38.73,48.77 0 bottom
U$83  [V_USB24]  48.01,48.77 0 bottom
U$84  [MEAS2]  47.88,56.9 0 bottom
U$85  [VIN1]  43.05,61.47 0 bottom
U$86  [5V25]  54.99,61.47 0 bottom
U$87  [3V325]  75.69,61.34 0 bottom
U$88  [3V3_SW25]  75.69,67.82 0 bottom
U$89  [22_#_SCL20]  106.17,67.82 0 bottom
U$90  [21_#_SDA24]  106.17,58.93 0 bottom
U$91  [ZED_RX224]  126.62,66.55 0 bottom
U$92  [ZED_TX2225]  126.75,62.74 0 bottom
U$93  [#SAFEBOOT#2226]  147.45,72.9 0 bottom
U$94  [ANT_DET2227]  148.34,80.52 0 bottom
U$95  [#ANT_SHT#2228]  137.03,80.64 0 bottom
U$96  [0_#_BOOT0]  113.92,75.44 0 bottom
U$97  [5_#_#GNSS_CS#1]  104.2,80.64 0 bottom
U$98  [23_#_PICO23]  114.17,90.68 0 bottom
U$99  [1_#_TX20]  106.3,88.14 0 bottom
U$100  [3_#_RX20]  115.95,86.87 0 bottom
U$101  [19_#_POCI19]  104.9,85.6 0 bottom
U$102  [18_#_SCK6]  113.67,83.06 0 bottom
U$103  [TP2230]  128.14,94.49 0 bottom
U$104  [99#2230]  129.92,91.82 0 bottom
U$105  [V_ANT2229]  141.48,92.84 0 bottom
U$106  [9#2230]  125.35,86.87 0 bottom
U$107  [VCCA0]  58.17,81.79 0 bottom
U$108  [34_#_TX_RDY0]  80.01,85.6 0 bottom
U$109  [33_#_#ETH_INT#0]  79.76,81.92 0 bottom
U$110  [26_#_LED0]  81.28,79.25 0 bottom
U$111  [27_#_#ETH_CS#0]  79.63,76.84 0 bottom
U$112  [#RESET#0]  82.04,89.53 0 bottom
U$113  [PW#0]  14.48,96.9 270 bottom
U$114  [PW#1]  17.02,97.03 270 bottom
U$115  [#3V3_SW#0]  65.41,97.79 270 bottom
U$116  [#SDA#7]  68.96,100.2 270 bottom
U$117  [#SCL#8]  72.39,100.46 270 bottom
U$118  [#16_#_RXD#17]  82.93,104.78 270 bottom
U$119  [#17_#_TXD#0]  86.36,104.65 90 top
U$120  [#17_#_TXD#18]  86.36,104.65 270 bottom
U$121  [#TP#0]  89.92,104.65 90 top
U$122  [#TP#1]  89.92,104.65 270 bottom
U$123  [#GND#6]  61.98,109.09 270 bottom
U$124  [#5V#0]  58.42,109.09 270 bottom
U$125  [16_#_RXD18]  113.92,77.66 0 top
U$126  [16_#_RXD18]  105.47,77.98 0 bottom
U$127  [17_#_TXD0]  116.46,79.31 0 top
U$128  [17_#_TXD0]  116.33,79.31 0 bottom
U$129  [CLK13]  42.42,26.04 270 bottom
U$130  [CMD14]  44.96,25.78 270 bottom
U$131  [DAT10]  38.61,33.78 270 bottom
U$132  [DAT011]  39.88,25.4 270 bottom
U$133  [DAT315]  46.35,33.91 270 bottom
U$134  [DAT2316]  47.5,25.4 270 bottom
U$135  [GND12]  41.15,33.4 270 bottom
U$136  [POE_LOAD0]  30.99,60.2 90 top
U$137  [DAT2316]  50.8,28.45 0 top
U$138  [CMD14]  50.29,27.18 0 top
U$139  [CLK13]  34.8,27.18 0 top
U$140  [DAT011]  34.16,29.72 0 top
U$141  [PWR_EN2233]  33.4,28.45 0 top
U$142  [DAT10]  34.29,30.99 0 top
U$143  [GND12]  34.67,32.26 0 top
U$144  [3V3_SW15]  51.56,32.26 0 top
U$145  [DAT315]  50.8,30.99 0 top
U$146  [HIGH_TEMP_WARNING]  18.29,55.12 0 top
U$147  [HIGH_TEMP_WARNING]  39.37,75.82 0 top
U$148  [RESET0]  108.33,22.86 0 bottom
U$149  [0_#_BOOT0]  133.86,22.86 0 bottom
U$150  [250]  128.14,95.63 0 top
U$151  [250]  128.27,95.63 0 bottom
U$152  [RTK5#SVG0]  136.39,32.26 0 top
U$153  [RTK5#SVG0]  83.05,32.26 0 bottom
V_TP  JUMPER-SMT_2_NC_TRACE_SILK  [SMT-JUMPER_2_NC_TRACE_SILK]  122.43,91.95 90 bottom
VANT  TEST-POINTPOGO_PTH  [1X01_NO_SILK]  141.48,94.49 0 top
VCCA  TEST-POINTPOGO_PTH  [1X01_NO_SILK]  55.12,81.79 0 top
VIN  TEST-POINTPOGO_PTH  [1X01_NO_SILK]  47.5,61.47 0 top
VPOE  TEST-POINTPOGO_PTH  [1X01_NO_SILK]  41.15,55.12 0 top
VPOE7  TEST-POINTPOGO_PTH  [1X01_NO_SILK]  41.15,30.99 90 top
VUSB  TEST-POINTPOGO_PTH  [1X01_NO_SILK]  44.96,48.77 0 top
VUSB2  TEST-POINTPOGO_PTH  [1X01_NO_SILK]  47.5,48.77 0 top
Y1  25MHz  [CRYSTAL-SMD-2.0X1.6MM]  72.9,88.14 270 top

## Library data of the parts
3V3 3V3_SW 5V 9% 99% !SAFEBOOT_ZED! ANT_DET ANT_SHT CLK CMD CMD1 DAT0 DAT1-DAT3 DTR ETH_CS ETH_INT GNSS_CS PICO POCI PWREN RTS RX RX2 RXD SCK SCL SDA TP TP_BOOT TP_LED TP_RESET TX TX2 TX_RDY TXD VANT VCCA VIN VPOE VPOE7 VUSB VUSB2 = SparkFun-Connectors
ACT BOOT_SW DSEL I2C LED LINK LOAD MEAS PM0 PM1 PM2 PW+ PW- RESET_SW SHLD1-SHLD3 V_TP = SparkFun-Jumpers
BOOT RESET = SparkFun-Switches; PROD_ID: SWCH-13896
C1 C3 C5 C6 C8-C10 C14 C18 C25 C26 C29 C56 = SparkFun-Capacitors; PROD_ID: CAP-07888
C2 C7 C12 C15 C17 C19 C21 C23 C30 C33-C38 C51-C54 = SparkFun-Capacitors; PROD_ID: CAP-08604
C4 C40 C43 = SparkFun-Capacitors; PROD_ID: CAP-00867
C11 C13 = SparkFun-Capacitors; PROD_ID: CAP-08913
C16 C47 C49 C50 = SparkFun-Capacitors; PROD_ID: CAP-14259
C20 C22 C32 C39 C55 = SparkFun-Capacitors; PROD_ID: CAP-11015
C24 = SparkFun-Capacitors; PROD_ID: CAP-00868
C27 C28 = SparkFun-Capacitors; PROD_ID: CAP-11812
C31 = SparkFun-Capacitors
C41 = SparkFun-Capacitors; PROD_ID: CAP-08280
C42 = SparkFun-Capacitors; PROD_ID: CAP-16238
C44 C45 = SparkFun-Capacitors; PROD_ID: CAP-16239
C46 = SparkFun-Capacitors; PROD_ID: CAP-07885
C48 C57 = SparkFun-Capacitors; PROD_ID: CAP-12547
D1 D3 = SparkFun-DiscreteSemi; DIGIKEY_PART: PESD0402-140CT-ND; MOUSE_PART: 650-PESD0402-140; PROD_ID: DIO-15359
D2 = SparkFun-LED; PROD_ID: DIO-13890
D4-D6 D9 = SparkFun-DiscreteSemi; PROD_ID: DIO-14072
D7 D8 D10 = SparkFun-DiscreteSemi; PROD_ID: IC-13538
E$1-E$4 FD1-FD4 LOGO2-LOGO8 U$146 U$147 = SparkFun-Aesthetics
E$5 E$6 = SparkFun-Retired
F1 = SparkFun-Fuses; PROD_ID: RES-14313
FB1 = SparkFun-Coils; PROD_ID: NDUC-14988
FB2 = SparkFun-Coils; PROD_ID: NDUC-12579
H1-H10 = SparkFun-Hardware
J1 J5 J6 = SparkFun-Connectors; PROD_ID: CONN-14122
J2 J10 = SparkFun-RF; PROD_ID: CONN-08289
J3 = SparkFun-Connectors; PROD_ID: CONN-16110
J4 J11 = SparkFun-Connectors; PROD_ID: CONN-14483
J7 = SparkFun-RF; PROD_ID: CONN-00827
J8 = SparkFun-Connectors; PROD_ID: CONN-09193
J9 = SparkFun-Connectors; PROD_ID: CONN-16253
J13 = SparkFun-Connectors; PROD_ID: CONN-17279; STOREFRONT: PRT-21328
L1 = SparkFun-Coils; PROD_ID: NDUC-14234
Q1 Q2 = SparkFun-DiscreteSemi; PROD_ID: TRANS-13337
R1 R2 R27 R28 R33 R34 = SparkFun-Resistors; PROD_ID: RES-12083
R3-R5 R10-R14 R22 R30-R32 R49-R52 R54 R57 R58 = SparkFun-Resistors; PROD_ID: RES-00824
R6 R36-R39 R46 R47 = SparkFun-Resistors; PROD_ID: RES-08270
R7 R8 = SparkFun-Resistors; PROD_ID: RES-09334
R9 R35 R40-R42 = SparkFun-Resistors; PROD_ID: RES-16237
R15 R17 R18 R20 R21 R23 R48 = SparkFun-Resistors; PROD_ID: RES-07828
R16 R19 = SparkFun-Resistors; PROD_ID: RES-08272
R24 = SparkFun-Resistors; PROD_ID: RES-07868
R25 R26 R44 R53 R56 R63 = SparkFun-Resistors; PROD_ID: RES-07856
R29 = SparkFun-Resistors; PROD_ID: RES-16236
R43 = SparkFun-Resistors; PROD_ID: RES-12581
R45 R55 R59-R61 = SparkFun-Resistors; PROD_ID: RES-16252
R62 = SparkFun-Resistors; PROD_ID: RES-07869
U1 = SparkFun-RF; PROD_ID: IC-15442
U2 = SparkFun-IC-Comms; PROD_ID: IC-14038
U3 U6 = SparkFun-IC-Power; IOUT: 700mA; PROD_ID: VREG-16775; VOUT: 3.3V
U4 = SparkFun-GPS; PROD_ID: IC-14209
U5 = SparkFun-IC-Special-Function; PROD_ID: IC-15951
U7 = SparkFun-IC-Comms; PROD_ID: IC-16240
U8 = SparkFun-IC-Amplifiers; PROD_ID: IC-11224
U9 = SparkFun-IC-Logic; PROD_ID: IC-16528
U10 = SparkFun-IC-Power; PROD_ID: IC-16251
U11 U13 = SparkFun-IC-Amplifiers; PROD_ID: IC-08251
U$2-U$49 U$55-U$145 U$148-U$153 = output
Y1 = SparkFun-Clocks; PROD_ID: XTAL-16235

## Nets
3.3V: 3V3.1 C1.1 C2.1 C3.1 C4.1 C12.1 C14.1 C15.1 C24.1 C25.1 C26.1 C29.1 C30.1 I2C.2 R3.2 R17.2 R20.2 R21.2 R22.2 R52.1 R54.1 R57.1 U1.2 U2.4 U2.16 U4.33 U4.34 U4.36 U4.38 U5.8 U5.8S U6.5 U9.14
3.3V_SW: 3V3_SW.1 C5.1 C6.1 C7.1 C18.1 C19.1 C20.1 C21.1 C32.1 C52.1 C55.1 C56.1 CMD1.1 FB2.1 J3.4 J4.2 J9.11 J9.13 J11.2 J13.8 R10.2 R11.2 R12.2 R13.2 R14.2 R30.2 R31.2 R32.2 U3.5 U7.28
5V: 5V.1 C8.1 C9.1 C10.1 C16.1 C17.1 C22.1 C23.1 C51.1 C53.1 C54.1 C57.+ F1.1 J13.10 R53.1 R55.1 R59.1 R60.1 R61.1 U3.1 U6.1 U6.3 U8.7 U11.5 U13.5
5V_RAW: C48.+ C49.1 C50.1 L1.1 U10.1 U10.2
9%: 9%.1 R48.2 R58.1 U13.3
99%: 99%.1 R48.1 R53.2 U11.4
!ANT_SHORT!: ANT_SHT.1 Q2.6 R57.2 U4.6
!RESET!: C31.1 Q1.3 R3.1 RESET_SW.1 TP_RESET.1 U1.3 U4.49 U7.37 U9.12
!SAFEBOOT_ZED!: !SAFEBOOT_ZED!.1 U4.50
ACT: ACT.1 J9.14
ACT_LED: R26.2 U7.27
ANT_DET: ANT_DET.1 Q2.3 R54.2 U4.4
CH340-DTR: DTR.1 Q1.1 R4.2 U2.13
CH340-RTS: Q1.4 R5.2 RTS.1 U2.14
CH340-RX: TX.1 U1.35 U2.3
CH340-TX: RX.1 U1.34 U2.2
D+: D10.1 J1.A6 J1.B6 U2.5
D+_ZED: D8.1 J6.A6 J6.B6 R7.1
D-: D10.3 J1.A7 J1.B7 U2.6
D-_ZED: D8.3 J6.A7 J6.B7 R8.1
DSEL: DSEL.2 U4.47
ESP0/!BOOT!: BOOT_SW.1 Q1.6 TP_BOOT.1 U1.25
ESP2/DAT0: U1.24 U9.1
ESP4/DAT1: DAT1.1 J3.8 R12.1 U1.26
ESP5/!GNSS_CS!: GNSS_CS.1 R17.1 U1.29 U4.44
ESP12/DAT2: U1.14 U9.4
ESP13/DAT3: DAT3.1 J3.2 R14.1 U1.16
ESP14/CLK: CLK.1 J3.5 U1.13
ESP15/CMD: U1.23 U9.8
ESP16/RXD: J13.3 RXD.1 U1.27
ESP17/TXD: J13.2 TXD.1 U1.28
ESP18/SCK: R20.1 SCK.1 U1.30 U4.45 U7.33
ESP19/POCI: POCI.1 R22.1 U1.31 U4.42 U7.34
ESP21/SDA: J4.3 J11.3 J13.7 R19.1 SDA.1 U1.33 U5.5 U5.5S
ESP22/SCL: J4.4 J11.4 J13.6 R16.1 SCL.1 U1.36 U5.6 U5.6S
ESP23/PICO: PICO.1 R21.1 U1.37 U4.43 U7.35
ESP25/TP: J13.1 R6.2 TP.1 U1.10 U8.3
ESP26/LED: R62.1 TP_LED.1 U1.11
ESP27/!ETH_CS!: ETH_CS.1 U1.12 U7.32
ESP32/PWREN: U1.8 U9.11
ESP33/!ETH_INT!: ETH_INT.1 U1.9 U7.36
ESP34/TX_RDY: TX_RDY.1 U1.6 U4.46
GND: BOOT.1 C1.2 C2.2 C3.2 C4.2 C5.2 C6.2 C7.2 C8.2 C9.2 C10.2 C11.2 C12.2 C14.2 C15.2 C16.2 C17.2 C18.2 C19.2 C20.2 C21.2 C22.2 C23.2 C24.2 C25.2 C26.2 C27.2 C28.2 C29.2 C30.2 C31.2 C32.2 C33.2 C34.2 C35.2 C36.2 C37.2 C38.2 C39.2 C40.2 C41.2 C42.2 C43.2 C46.2 C47.2 C48.- C49.2 C50.2 C51.2 C52.2 C53.2 C54.2 C55.2 C56.2 C57.- D1.2 D2.C D3.2 D7.2 D8.2 D10.2 DSEL.1 J1.GND J1.GND2 J2.GND@0 J2.GND@1 J2.GND@2 J2.GND@3 J3.6 J3.10 J3.11 J3.12 J3.13 J4.1 J5.GND J5.GND2 J6.GND J6.GND2 J7.GND@0 J7.GND@1 J7.GND@2 J7.GND@3 J8.1 J8.2 J10.GND@0 J10.GND@1 J10.GND@2 J10.GND@3 J11.1 J13.9 PM0.1 PM1.1 PM2.1 Q2.1 Q2.4 R1.1 R2.1 R15.1 R18.1 R27.1 R28.1 R29.1 R33.1 R34.1 R45.1 R49.1 R50.1 R58.2 RESET.1 SHLD1.1 SHLD2.1 SHLD3.1 U1.1 U1.15 U1.38 U1.GND U1.GNDT1 U1.GNDT2 U1.GNDT3 U1.GNDT4 U1.GNDT5 U1.GNDT6 U1.GNDT7 U1.GNDT8 U2.1 U3.2 U4.1 U4.3 U4.12 U4.14 U4.32 U4.37 U4.41 U4.48 U4.55 U4.56 U4.57 U4.58 U4.59 U4.60 U4.61 U4.62 U4.63 U4.64 U4.65 U4.66 U4.67 U4.68 U4.69 U4.70 U4.71 U4.72 U4.73 U4.74 U4.75 U4.76 U4.77 U4.78 U4.79 U4.80 U4.81 U4.82 U4.83 U4.84 U4.85 U4.86 U4.87 U4.88 U4.89 U4.90 U4.91 U4.92 U4.93 U4.94 U4.95 U4.96 U4.97 U4.98 U4.99 U4.100 U4.101 U4.102 U5.4 U5.4S U5.P U6.2 U7.3 U7.9 U7.14 U7.16 U7.19 U7.29 U7.48 U8.4 U8.PAD U9.7 U9.EPAD U10.3 U11.2 U13.2 VPOE7.1
GND-ISO: C42.1 J9.7 J9.8 J9.S1 J9.S2
LINK: J9.12 LINK.1
LINK_LED: R25.2 U7.25
MEAS: D4.C D5.C D6.C D9.C MEAS.2 MEAS.4
N$1: J1.B5 R1.2
N$2: J1.A5 R2.2
N$3: R7.2 U4.40
N$4: Q1.2 R5.1
N$5: Q1.5 R4.1
N$6: R8.2 U4.39
N$7: LED.2 R62.2
N$8: J6.SHLD1 J6.SHLD2 J6.SHLD3 J6.SHLD4 SHLD2.2
N$9: J5.B5 R27.2
N$10: F1.2 MEAS.1 MEAS.3
N$11: R46.1 U4.27
N$12: ACT.2 R26.1
N$13: D3.1 J7.SIG J8.FEED
N$14: I2C.3 R16.2
N$15: I2C.1 R19.2
N$16: R9.2 U8.6
N$17: J10.SIG R9.1
N$18: R18.2 R23.1 R44.1 U8.2
N$19: C27.1 R24.1 U7.31 Y1.1
N$20: C28.1 R24.2 U7.30 Y1.3
N$21: LINK.2 R25.1
N$22: J5.A5 R28.2
N$23: R29.2 U7.10
N$24: C40.1 U7.22
N$25: C41.1 U7.20
N$26: R23.2 U8.1 V_TP.2
N$27: LOAD.1 R45.2
N$28: RESET.2 RESET_SW.2
N$29: BOOT.2 BOOT_SW.2
N$30: R49.2 U7.23
N$31: R44.2 V_TP.1
N$32: R47.1 U4.26
N$33: J6.B5 R33.2
N$34: J6.A5 R34.2
N$35: R56.1 U11.1
N$36: R6.1 U4.53
N$37: R50.2 R51.2 U1.7
N$38: Q2.5 R56.2
N$39: R51.1 R52.2
N$40: Q2.2 R63.2
N$41: R63.1 U13.1
N$42: C13.2 U4.2
N$43: J5.SHLD1 J5.SHLD2 J5.SHLD3 J5.SHLD4 SHLD3.2
N$45: D2.A LED.1
PMODE0: PM0.2 R30.1 U7.45
PMODE1: PM1.2 R31.1 U7.44
PMODE2: PM2.2 R32.1 U7.43
PW1+: PW+.1 PW+.3 U10.5 U10.6
PW1-: PW-.1 PW-.3 U10.7 U10.8
PW+: J9.9 PW+.2 PW+.4
PW-: J9.10 PW-.2 PW-.4
PWREN: PWREN.1 R15.2 U3.3 U9.5 U9.6 U9.10 U9.13
RCT: C43.1 J9.5 R35.1 R40.1
RD+: C45.2 J9.3
RD-: C44.2 J9.6
RF: C13.1 D1.1 FB1.2 J2.SIG
RXN: R39.1 U7.5
RXN1: C44.1 D7.4 R39.2 R40.2
RXP: R38.1 U7.6
RXP1: C45.1 D7.3 R35.2 R38.2
SD_CMD: CMD.1 J3.3 R10.1 U9.9
SD_DAT0: DAT0.1 J3.7 R11.1 U9.2
SD_DAT2: DAT2.1 J3.1 R13.1 U9.3
SHIELD: J1.SHLD1 J1.SHLD2 J1.SHLD3 J1.SHLD4 SHLD1.2
TCT: C46.1 J9.4 R43.1
TD+: D7.6 J9.1 R36.2 R41.1
TD-: D7.1 J9.2 R37.2 R42.1
TXN: R37.1 U7.1
TXP: R36.1 U7.2
V_ANT: C11.1 FB1.1 R55.2 R59.2 R60.2 R61.2 U11.3 U13.4 VANT.1
V_POE: C47.1 D9.A L1.2 LOAD.2 VPOE.1
V_USB: D5.A D10.5 J1.VBUS1 J1.VBUS2 VUSB.1
V_USB_2: D6.A D8.5 J6.VBUS1 J6.VBUS2 VUSB2.1
VCCA: C33.1 C34.1 C35.1 C36.1 C37.1 C38.1 C39.1 D7.5 FB2.2 R41.2 R42.2 R43.2 U7.4 U7.8 U7.11 U7.15 U7.17 U7.21 VCCA.1
VIN: D4.A J5.VBUS1 J5.VBUS2 VIN.1
ZED_RX2: J13.5 R47.2 RX2.1
ZED_TX2: J13.4 R46.2 TX2.1